# EAGLE board shield (EAGLE 6.4)
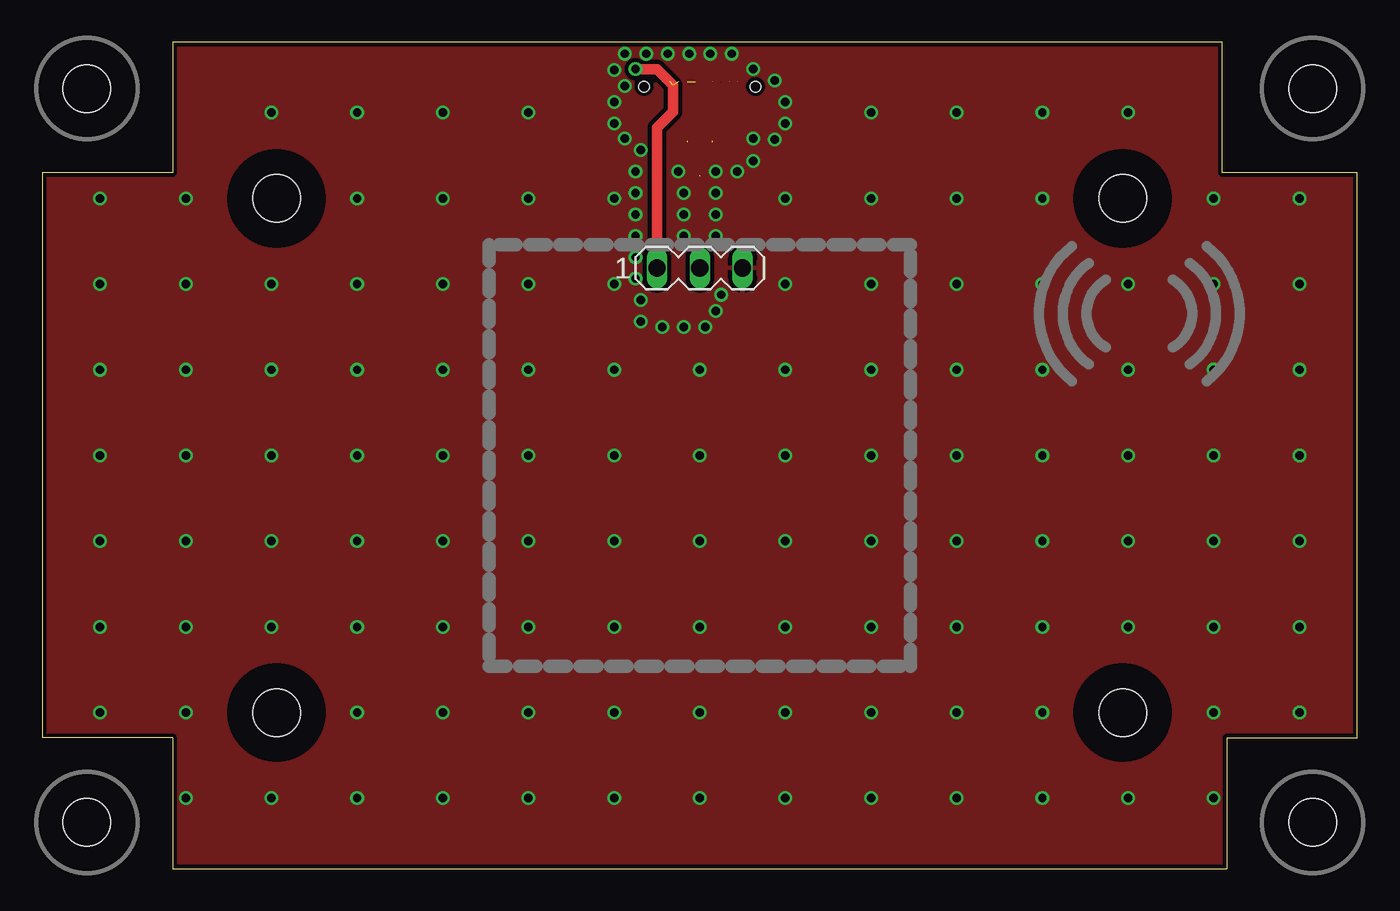
[diagram p0: board, top side]
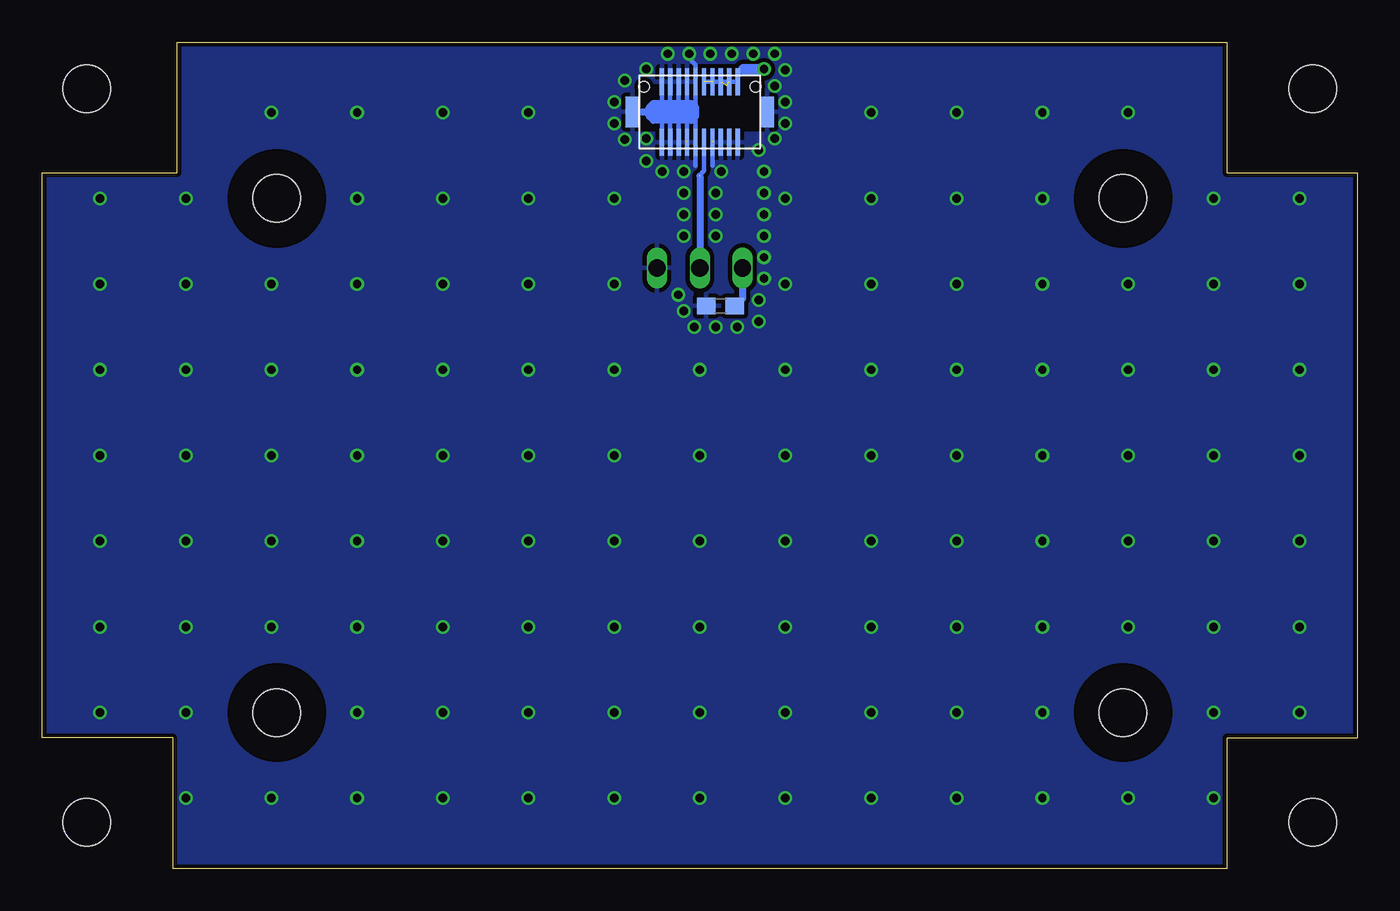
[diagram p1: board, bottom side, seen from below]

Size 78 x 49 mm. Coordinates in mm from the lower left corner, seen from the top.
Outline: 7.75,0 70.25,0 70.25,7.75 78,7.75 78,41.25 70,41.25 70,49 7.75,49 7.75,41.25 0,41.25 0,7.75 7.75,7.75 7.75,0
Copper layers (1*2*15*16): Top 0.035mm / dielectric 0.2mm / Route2 0.0175mm / dielectric 1.1mm / Route15 0.0175mm / dielectric 0.2mm / Bottom 0.035mm
Design rules "SeeedStudio_DRU_no_angle_20130527 *": minimum track width 6mil, minimum drill 12mil, track to track 6mil, track to pad 6mil, pad to pad 6mil, via to via 6mil, smd to smd 0mil, copper to edge 10mil, drill to drill 10mil, minimum pad ring 4mil, minimum via ring 6mil, stop-mask expansion 2mil, vias tented up to drill 25mil, thermal gap 10mil
Holes 2.8 mm at 13.9,9.25 64.1,9.25 64.1,39.75 13.9,39.75 2.65,46.25 2.65,2.75 75.35,2.75 75.35,46.25
tRestrict: area 11.4,6.7 to 16.4,11.8; area 11.4,37.2 to 16.4,42.3; area 61.5,6.7 to 66.6,11.8; area 61.5,37.2 to 66.6,42.3
bRestrict: area 11.4,37.2 to 16.4,42.3; area 11.4,6.7 to 16.4,11.8; area 61.5,6.7 to 66.6,11.8; area 61.5,37.2 to 66.6,42.3

## Footprints (pad centres in the part's own frame; a part is rotated, then mirrored left to right if it is on the bottom)
C0603 = smd 1.1 x 1: 1 -0.85,0; 2 0.85,0
MA03-1 = drill 1.016 long: 1 -2.54,0; 2 0,0; 3 2.54,0
DF12-3.0-60 = smd 1.6 x 0.25: P$1 -1.8,2.25; P$2 -1.8,1.75; P$3 -1.8,1.25; P$4 -1.8,0.75; P$5 -1.8,0.25; P$6 -1.8,-0.25; P$7 -1.8,-0.75; P$8 -1.8,-1.25; P$9 -1.8,-1.75; P$10 -1.8,-2.25; P$11 1.8,-2.25; P$12 1.8,-1.75; P$13 1.8,-1.25; P$14 1.8,-0.75; P$15 1.8,-0.25; P$16 1.8,0.25; P$17 1.8,0.75; P$18 1.8,1.25; P$19 1.8,1.75; P$20 1.8,2.25 | smd 1.8 x 0.8: TAB1 0,4; TAB2 0,-4 | hole 0.6: 1.5,-3.3; 1.5,3.3

## Placement (x,y rotation side)
C1  47n  [C0603]  37.77,33.36 180 bottom
CONN_SENSOR1  [MA03-1]  39,35.61 0 top
E$1  [DF12-3.0-60]  39,44.86 90 bottom

## Library data of the parts
C1 = rcl
CONN_SENSOR1 = con-lstb; OC_FARNELL: unknown; OC_NEWARK: unknown
E$1 = con-hirose-DF12-20

## Nets
+3V3: C1.1 CONN_SENSOR1.1 E$1.P$11 E$1.P$12 E$1.P$13 E$1.P$14 E$1.P$15
GND: C1.2 CONN_SENSOR1.3 E$1.P$1 E$1.P$2 E$1.P$3 E$1.P$4 E$1.P$5 E$1.P$7 E$1.P$8 E$1.P$9 E$1.P$10 E$1.P$16 E$1.P$17 E$1.P$18 E$1.P$19 E$1.P$20 E$1.TAB1 E$1.TAB2
S$1: CONN_SENSOR1.2 E$1.P$6

## Tracks (layer width: path | path; a pad name or v marks a point on that pad's centre or on a via)
+3V3  (via drill 0.5)  (5 unrouted)
  Top 0.61: CONN_SENSOR1.1 36.46,43.91 37.41,44.86 37.41,46.45 36.46,47.41 v35.19,47.41
  Bottom 0.254: E$1.P$15 E$1.P$11 | 36.41,47.41 36.75,47.07 E$1.P$11
  Bottom 0.406: CONN_SENSOR1.1 36.46,33.81 C1.1
  Bottom 0.61: v35.19,47.41 36.41,47.41
GND  (via drill 0.5 pad 0.61)  (6 unrouted)
  Bottom 0.254: 38.25,43.16 38.25,41.66 | 39.5,47.91 39.25,47.66 39.25,45.16 39.5,45.36 | 39.25,41.66 39.25,44.66 39.5,44.36 | E$1.P$17 39.75,43.16 | 40.25,43.16 E$1.P$18 | 40.75,43.16 E$1.P$19 | 41.25,43.16 E$1.P$20
  Bottom 0.406: E$1.TAB1 42,44.86 | 42,44.86 42,45.11 41.75,45.36 39.5,45.36 39.25,45.11 | 39.25,45.11 39.25,44.86 | 39.25,44.86 39.25,44.66 39.25,44.61 | 39.25,44.61 39.5,44.36 41.75,44.36 42,44.61 42,44.86 | 39.25,45.11 41.75,45.16 | 42,44.86 39.25,44.86 | 39.25,44.61 41.75,44.66
  other vias: 18.68,44.82 18.68,39.74 23.76,44.82 13.6,44.82 18.68,34.66 18.68,29.58 8.52,39.74 13.6,34.66 3.44,39.74 8.52,34.66 13.6,29.58 8.52,29.58 3.44,34.66 3.44,29.58 18.68,4.18 8.52,9.26 13.6,4.18 8.52,4.18 28.84,44.82 28.84,39.74 23.76,39.74 23.76,34.66 28.84,34.66 28.84,29.58 23.76,29.58 28.84,24.5 28.84,19.42 28.84,14.34 28.84,9.26 28.84,4.18 23.76,4.18 23.76,9.26 23.76,14.34 23.76,19.42 23.76,24.5 33.92,44.19 33.92,39.74 33.92,34.66 33.92,29.58 39,29.58 44.08,29.58 44.08,34.66 44.08,39.74 44.08,44.19 39.95,37.52 39.95,33.07 49.16,29.58 54.24,29.58 59.32,29.58 64.4,29.58 64.4,34.66 59.32,34.66 54.24,34.66 49.16,34.66 49.16,39.74 49.16,44.82 54.24,44.82 54.24,39.74 59.32,39.74 59.32,44.82 64.4,44.82 8.52,19.42 13.6,19.42 18.68,19.42 18.68,24.5 13.6,24.5 8.52,24.5 54.24,19.42 59.32,19.42 64.4,19.42 64.4,24.5 59.32,24.5 54.24,24.5 3.44,24.5 3.44,19.42 3.44,14.34 3.44,9.26 8.52,14.34 13.6,14.34 18.68,14.34 18.68,9.26 33.92,14.34 33.92,19.42 33.92,24.5 39,24.5 44.08,24.5 49.16,24.5 49.16,19.42 44.08,19.42 39,19.42 33.92,9.26 33.92,4.18 39,4.18 39,9.26 39,14.34 44.08,14.34 49.16,14.34 49.16,9.26 44.08,9.26 44.08,4.18 49.16,4.18 54.24,4.18 54.24,9.26 54.24,14.34 59.32,9.26 59.32,14.34 59.32,4.18 64.4,4.18 69.48,4.18 69.48,9.26 74.56,9.26 64.4,14.34 69.48,14.34 74.56,14.34 74.56,19.42 69.48,19.42 69.48,34.66 69.48,29.58 69.48,24.5 74.56,24.5 74.56,29.58 74.56,34.66 74.56,39.74 69.48,39.74 37.73,41.33 34.55,43.28 38.05,40.06 38.05,37.52 42.17,43.28 39.95,41.33 39.95,40.06 40.27,34.02 42.17,47.41 33.92,47.36 39.63,48.31 40.91,48.31 43.45,46.73 44.08,45.45 43.45,43.23 38.37,48.31 37.09,48.31 35.83,48.31 34.55,48.31 33.92,45.45 34.55,46.41 35.51,42.6 41.22,41.33 42.17,41.96 38.05,38.79 39.95,38.79 39.32,32.12 38.05,32.12 36.78,32.12 35.51,32.44 35.51,33.71 35.19,34.98 35.19,36.25 35.19,37.52 35.19,38.79 35.19,40.06 35.19,41.33
  pour Top (isolate 0.254, rank 6): 0,41.25 7.75,41.25 7.75,49 70,49 70,41.25 78,41.25 78,7.75 70.25,7.75 70.25,0 7.75,0 7.75,7.75 0,7.75
  pour Bottom (isolate 0.254, rank 6): 0,41.25 7.75,41.25 7.75,49 70,49 70,41.25 78,41.25 78,7.75 70.25,7.75 70.25,0 7.75,0 7.75,7.75 0,7.75
S$1  (1 unrouted)
  Bottom 0.254: E$1.P$6 38.75,41.36 39,41.11
  Bottom 0.406: 39,41.06 CONN_SENSOR1.2

## Text on the board
tDocu: 24.000- / 24.250 GHz / 13 dBm | RSM-3650